# Allegro board daughter_card-v1_00-0a.brd
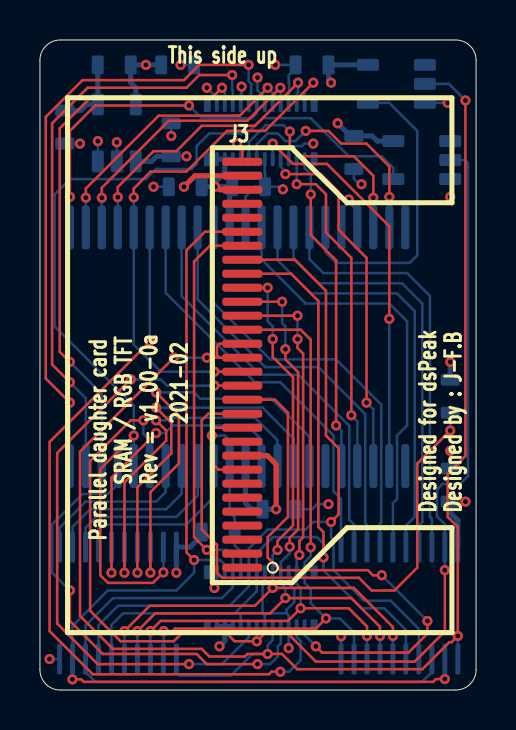
[diagram p0: board, top side]
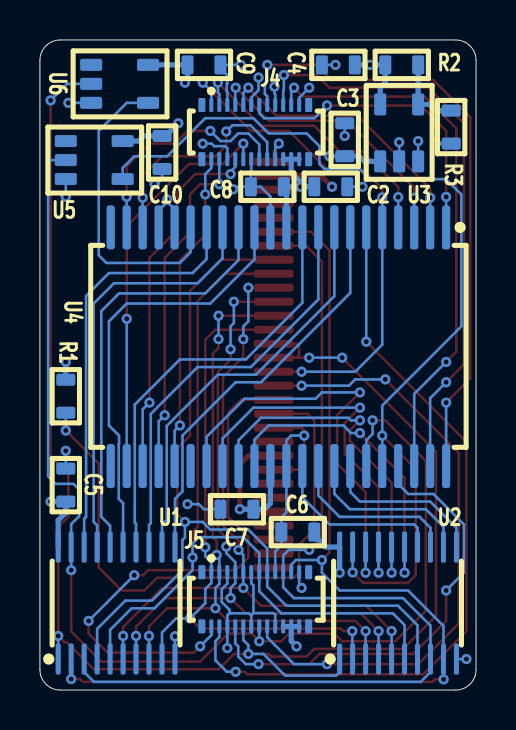
[diagram p1: board, bottom side, seen from below]

Outline 21.84 x 32.51 mm; copper layers: TOP, INNER1, INNER2, BOTTOM. Coordinates in mm from the lower left corner of the outline.
Outline path: 0,31.5 0,1.02 arc(0.3,0.3) 1.02,0 20.83,0 arc(21.55,0.3) 21.84,1.02 21.84,31.5 arc(21.55,32.21) 20.83,32.51 1.02,32.51 arc(0.3,32.21) 0,31.5

## Design rules (mm)
constraint set DEFAULT: min track width 0.127

## Placement (name value [footprint] x y rotation side)
C2  0.1uF  [0603_CAP_IPC]  8.1 25.17 180 bottom
C3  0.1uF  [0603_CAP_IPC]  6.58 26.7 90 bottom
C4  1uF  [0603_CAP_IPC]  6.07 31.27 0 bottom
C5  0.1uF  [0603_CAP_IPC]  20.55 9.42 90 bottom
C6  0.1uF  [0603_CAP_IPC]  8.1 7.9 0 bottom
C7  0.1uF  [0603_CAP_IPC]  11.15 9.04 0 bottom
C8  0.1uF  [0603_CAP_IPC]  9.63 25.17 0 bottom
C9  0.1uF  [0603_CAP_IPC]  14.45 31.27 180 bottom
C10  0.1uF  [0603_CAP_IPC]  15.72 27.71 270 bottom
J3  LCD 0.96" 128x64  [ER-TFT0_96-2]  10.13 6.12 90 top
J4  DF40C-24DP-0.4V  [DF40C-24DP-04V51]  13.26 29.26 0 bottom
J5  DF40C-24DP-0.4V  [DF40C-24DP-04V51]  13.26 5.89 0 bottom
NOREF  -  []  0 31.5 0 top
NOREF#2  -  []  20.83 1.02 90 top
R1  10k  [0603_RES_IPC]  20.55 15.52 270 bottom
R2  1M33  [0603_RES_IPC]  4.55 31.27 180 bottom
R3  1Meg  [0603_RES_IPC]  1.24 28.98 270 bottom
U1  SN74AC245PWR  [TSSOP20-0_65MM]  20.93 1.55 90 bottom
U2  SN74AC245PWR  [TSSOP20-0_65MM]  6.83 1.55 90 bottom
U3  TC107X  [SOT23-5]  4.8 26.44 180 bottom
U4  CY7C1021DV33-10ZSXIT  [TSSOP44-0_8MM]  1.5 23.14 270 bottom
U5  74AHC1G14  [SOT23-5]  20.55 27.46 270 bottom
U6  74AHC1G14  [SOT23-5]  19.28 31.27 270 bottom

## Library data of the parts
C2-C10 = CAP-NP
J3 = ER-TFT0.96-2
J4 J5 = DF40C-24DP-0_8.4V
R1-R3 = Resistor
U1 U2 = SN74AC245PWR
U3 = TC107X
U4 = CY7C1021DV33-10ZSXIT
U5 U6 = 74AHC1G14

## Footprints (pads in the part's own frame, mm; a bottom-side part is the same pattern mirrored in y, then rotated)
0603_CAP_IPC
  rrect 0.599x0.95 smd: 1(0,0) 2(1.651,0)
0603_RES_IPC
  rrect 0.599x0.95 smd: 1(0,0) 2(1.651,0)
DF40C-24DP-04V51
  rrect 0.201x0.701 smd: 1(0,0) 2(0,2.71) 3(-0.399,0) 4(-0.399,2.71) 5(-0.8,0) 6(-0.8,2.71) 7(-1.199,0) 8(-1.199,2.71) 9(-1.6,0) 10(-1.6,2.71) 11(-1.999,0) 12(-1.999,2.71) 13(-2.4,0) 14(-2.4,2.71) 15(-2.799,0) 16(-2.799,2.71) 17(-3.2,0) 18(-3.2,2.71) 19(-3.599,0) 20(-3.599,2.71) 21(-4,0) 22(-4,2.71) 23(-4.399,0) 24(-4.399,2.71)
  rrect 0.35x0.701 smd: 25(0.475,2.71) 26(0.475,0) 27(-4.874,2.71) 28(-4.874,0)
ER-TFT0_96-2
  rrect 0.399x1.999 smd: 1(0,0) 2(0.701,0) 3(1.399,0) 4(2.101,0) 5(2.799,0) 6(3.5,0) 7(4.201,0) 8(4.9,0) 9(5.601,0) 10(6.299,0) 11(7,0) 12(7.699,0) 13(8.4,0) 14(9.101,0) 15(9.799,0) 16(10.5,0) 17(11.199,0) 18(11.9,0) 19(12.601,0) 20(13.299,0) 21(14.001,0) 22(14.699,0) 23(15.4,0) 24(16.101,0) 25(16.8,0) 26(17.501,0) 27(18.199,0) 28(18.9,0) 29(19.601,0) 30(20.3,0)
SOT23-5
  rrect 0.599x1.1 smd: 1(0,0) 2(0.95,0) 3(1.9,0) 4(1.9,2.85) 5(0,2.85)
TSSOP20-0_65MM
  rrect 1.549x0.249 smd: 1(0,0) 2(0,-0.65) 3(0,-1.3) 4(0,-1.951) 5(0,-2.601) 6(0,-3.251) 7(0,-3.899) 8(0,-4.549) 9(0,-5.199) 10(0,-5.85) 11(5.601,-5.85) 12(5.601,-5.199) 13(5.601,-4.549) 14(5.601,-3.899) 15(5.601,-3.251) 16(5.601,-2.601) 17(5.601,-1.951) 18(5.601,-1.3) 19(5.601,-0.65) 20(5.601,0)
TSSOP44-0_8MM
  rrect 2.2x0.409 smd: 1(0,0) 2(0,-0.8) 3(0,-1.6) 4(0,-2.4) 5(0,-3.2) 6(0,-4) 7(0,-4.801) 8(0,-5.601) 9(0,-6.401) 10(0,-7.201) 11(0,-8.001) 12(0,-8.801) 13(0,-9.601) 14(0,-10.399) 15(0,-11.199) 16(0,-11.999) 17(0,-12.799) 18(0,-13.599) 19(0,-14.399) 20(0,-15.199) 21(0,-15.999) 22(0,-16.8) 23(11.938,-16.8) 24(11.938,-15.999) 25(11.938,-15.199) 26(11.938,-14.399) 27(11.938,-13.599) 28(11.938,-12.799) 29(11.938,-11.999) 30(11.938,-11.199) 31(11.938,-10.399) 32(11.938,-9.601) 33(11.938,-8.801) 34(11.938,-8.001) 35(11.938,-7.201) 36(11.938,-6.401) 37(11.938,-5.601) 38(11.938,-4.801) 39(11.938,-4) 40(11.938,-3.2) 41(11.938,-2.4) 42(11.938,-1.6) 43(11.938,-0.8) 44(11.938,0)

## Nets
2V8: C4.1 J3.29 R2.1 U3.5(\VOUT\)
3V3: C2.1 C3.1 C5.1 C6.1 C7.1 C8.1 C9.1 C10.1 J3.9 J3.28 J4.20 J4.22 J4.24 J5.20 J5.22 J5.24 R1.1 U1.20(\VCC\) U2.20(\VCC\) U3.1 U3.3 U4.11 U4.33 U5.5 U6.5
DGND: C2.2 C3.2 C4.2 C5.2 C6.2 C7.2 C8.2 C9.2 C10.2 J3.8 J3.11 J3.30 J4.5 J4.6 J4.11 J4.12 J4.17 J4.18 J4.23 J5.5 J5.6 J5.11 J5.12 J5.17 J5.18 J5.23 R3.2 U1.10 U2.10 U3.2 U4.12 U4.18 U4.19 U4.34 U5.3 U6.3
MEM_D0: U1.11 U4.7
MEM_D1: U1.12 U4.8
MEM_D2: U1.13 U4.9
MEM_D3: U1.14 U4.10
MEM_D4: U1.15 U4.13
MEM_D5: U1.16 U4.14
MEM_D6: U1.17 U4.15
MEM_D7: U1.18 U4.16
MEM_D8: U2.18 U4.29
MEM_D9: U2.17 U4.30
MEM_D10: U2.16 U4.31
MEM_D11: U2.15 U4.32
MEM_D12: U2.14 U4.35
MEM_D13: U2.13 U4.36
MEM_D14: U2.12 U4.37
MEM_D15: U2.11 U4.38
NPMBE: U2.19 U4.40 U5.4(\Y\)
NPMRD/PMWR: J3.16(\WR\) J3.17 J5.10 U1.1 U2.1 U6.2
PMA0: J3.15 J4.1 U4.5
PMA1: J4.3 U4.4
PMA2: J4.7 U4.3
PMA3: J4.9 U4.2
PMA4: J4.13 U4.1
PMA5: J4.15 U4.44
PMA6: J4.19 U4.43
PMA7: J4.21 U4.42
PMA8: J4.2 U4.27
PMA9: J4.4 U4.26
PMA10: J4.8 U4.25
PMA11: J4.10 U4.24
PMA12: J4.14 U4.21
PMA13: J4.16 U4.20
PMBE: J5.14 U1.19 U4.39 U5.2
PMCS1: J3.13 J5.2
PMCS2: J5.4 U4.6
PMD0: J3.18 J5.1 U1.9 U2.2
PMD1: J3.19 J5.3 U1.8 U2.3
PMD2: J3.20 J5.7 U1.7 U2.4
PMD3: J3.21 J5.9 U1.6 U2.5
PMD4: J3.22 J5.13 U1.5 U2.6
PMD5: J3.23 J5.15 U1.4 U2.7
PMD6: J3.24 J5.19 U1.3 U2.8
PMD7: J3.25 J5.21 U1.2 U2.9
PMENB: J5.8 U4.41
PMP_GPIO: J3.14 J5.16
PMRD/NPMWR: U4.17(\W\\E\\\) U6.4(\Y\)
N18222: J3.12 R1.2
N24720: R2.2 R3.1 U3.4

Pads without a net: J3 1 2 3 4 5 6 7 10 26 27; J4 25 26 27 28; J5 25 26 27 28; U4 22 23 28; U5 1; U6 1

## Via types
v1: diameter 0.508, hole 0.254, TOP to BOTTOM, 120 vias

## Routing (per net, layer and track width the routed paths; a pad name or vN(x,y) marks a point on that pad's centre or on a via; arc(x,y) is an arc through that point)
2V8: length 13.6
  TOP w0.254: v1(7.21,25.17) 7.76,25.72 J3.29
  INNER2 w0.254: v1(5.31,31.27) 5.31,27.08 v1(7.21,25.17)
  BOTTOM w0.254: U3.5 4.8,30.12 4.55,30.38 R2.1 v1(5.31,31.27) C4.1
3V3: length 33.7
  TOP w0.254: J3.9 11.39,11.72 11.83,11.28 v1(11.83,9.04) ; v1(8.78,25.17) 8.86,25.17 9.01,25.02 J3.28
  BOTTOM w0.127: C3.1 v1(7.34,26.7) ; U3.3 v1(2.9,27.45)
  BOTTOM w0.254: J4.22 9.26,25.88 8.78,25.4 v1(8.78,25.17) ; J4.22 J4.20 ; J4.22 J4.24 ; U4.33 10.3,9.34 10.6,9.04 C7.1 v1(11.83,9.04) ; J5.22 9.26,2.45 v1(8.99,2.18) ; J5.22 J5.24 ; J5.22 J5.20 ; U3.1 5.6,26.44 5.85,26.7 C3.1 ; U4.11 9.5,25.04 C8.1 v1(8.78,25.17) ; R1.1 v1(20.55,16.41) ; v1(8.78,25.17) C2.1 ; C6.1 8.1,7.72 7.53,7.15 U2.20 v1(6.83,5.87) ; U1.20 20.93,8.49 20.55,8.87 C5.1 v1(21.31,9.42) ; v1(14.91,28.35) 15.55,27.71 C10.1 16.64,27.71 16.89,27.46 U5.5 ; v1(14.58,30.38) 14.45,30.51 C9.1 U6.5
DGND: length 52.9
  TOP w0.127: J3.11 8.74,13.12 8.61,12.99 v1(8.61,12.73) 8.61,11.36 8.94,11.02 J3.8 ; v1(9.88,27.33) 9.88,27.2 10.13,26.95 J3.30
  BOTTOM w0.127: U4.19 15.9,23.98 15.47,24.41 ; J4.18 10.06,27.15 v1(9.88,27.33) ; 12.35,3.84 12.46,3.72 J5.6 v1(12.46,2.1) ; 12.35,3.84 11.37,3.84 11.26,3.72 ; 12.35,3.84 12.35,4.01 12.74,4.4 12.74,5.04 12.46,5.32 J5.5 ; 11.28,25.17 12.04,25.17 v1(12.17,25.04) ; 11.28,25.17 11.28,25.84 11.26,25.85 J4.12 ; 11.28,25.17 10.79,25.17 10.3,24.68 U4.12 ; 15.47,24.41 v1(15.47,24.54) ; 15.47,24.41 15.1,24.04 U4.18 ; U3.2 v1(3.85,27.4) ; U6.3 v1(20.42,29.37) ; 12.8,9.04 13.63,9.04 13.88,9.3 v1(14.45,9.3) ; v1(13.69,27.33) 13.25,27.33 13.12,27.2 12.57,27.2 12.46,27.09 J4.6 ; C5.2 v1(20.55,11.96) ; 11.26,3.72 11.26,3.74 11.15,3.85 ; 11.26,3.72 J5.12 ; U2.10 v1(0.48,1.55) ; J4.11 11.26,29.63 10.9,30 v1(10.9,30.63) ; C3.2 v1(6.58,27.71) ; C2.2 v1(5.69,25.17) ; v1(8.36,30.12) 8.86,29.62 J4.23 ; v1(10.1,30.18) 10.1,29.83 10.06,29.79 J4.17 ; C10.2 15.72,25.57 15.99,25.3 v1(16.1,25.3) ; J5.11 11.26,5.34 11.15,5.23 11.15,3.85 11.15,3.85 ; J4.5 12.46,29.91 12.48,29.94 12.48,30.31 12.46,30.33 12.46,30.75 12.8,31.09 C9.2 v1(11.79,31.27) ; 11.15,3.85 10.15,3.85 10.06,3.76 J5.18 ; v1(8.74,5.11) 8.86,5.23 J5.23 ; J5.17 10.06,6.93 9.75,7.23 9.75,8.63 9.5,8.88 U4.34 9.5,12.49 9.27,12.73 v1(8.61,12.73) ; U5.3 v1(20.55,24.66) ; v1(7.04,31.27) C4.2 ; U1.10 v1(15.08,2.68) ; R3.2 v1(2.01,27.33)
MEM_D0: length 20.4
  BOTTOM w0.127: U4.7 6.3,19.86 10.77,15.39 12.04,15.39 14.7,12.73 14.7,9.94 15.08,9.56 U1.11
MEM_D1: length 20.7
  BOTTOM w0.127: U1.12 15.73,8.27 15.49,8.51 15.49,13.21 12.93,15.77 11.02,15.77 7.1,19.7 U4.8
MEM_D2: length 21.1
  BOTTOM w0.127: U4.9 7.9,19.53 11.28,16.15 13.94,16.15 16.29,13.81 16.29,8.35 16.38,8.26 U1.13
MEM_D3: length 21.4
  BOTTOM w0.127: U4.10 8.7,19.37 11.53,16.54 14.83,16.54 17.09,14.28 17.09,12.3 17.09,12.16 17.09,8.38 17.03,8.32 U1.14
MEM_D4: length 21.8
  BOTTOM w0.127: U1.15 17.68,9.35 17.89,9.56 17.89,12.3 17.88,12.31 17.88,12.73 18.39,13.23 18.39,18.44 17.5,19.33 13.31,19.33 11.1,21.54 U4.13
MEM_D5: length 21.5
  BOTTOM w0.127: U4.14 11.9,21.5 13.56,19.84 17.88,19.84 18.77,18.95 18.77,8.66 18.33,8.22 U1.16
MEM_D6: length 21.2
  BOTTOM w0.127: U4.15 12.7,21.59 13.94,20.35 18.14,20.35 19.15,19.33 19.15,8.41 18.98,8.23 U1.17
MEM_D7: length 21
  BOTTOM w0.127: U4.16 13.5,21.55 14.2,20.85 18.39,20.85 19.53,19.71 19.53,8.66 19.63,8.56 U1.18
MEM_D8: length 21.4
  TOP w0.127: v1(5.82,14.88) 6.96,13.74 6.96,11.33 5.53,9.9 v1(5.53,5.87)
  BOTTOM w0.127: U4.29 13.5,12.66 11.59,14.57 8.04,14.57 7.72,14.88 v1(5.82,14.88) ; U2.18 v1(5.53,5.87)
MEM_D9: length 19.5
  TOP w0.127: v1(5.82,14.12) 6.58,13.36 6.58,11.84 4.88,10.14 v1(4.88,5.87)
  BOTTOM w0.127: U2.17 v1(4.88,5.87) ; v1(5.82,14.12) 11.15,14.12 12.7,12.58 U4.30
MEM_D10: length 17.9
  TOP w0.127: v1(4.23,5.87) 4.23,10.38 6.32,12.47 6.32,12.98 v1(5.82,13.49)
  BOTTOM w0.127: v1(5.82,13.49) 6.26,13.49 6.39,13.61 10.77,13.61 11.9,12.49 U4.31 ; U2.16 v1(4.23,5.87)
MEM_D11: length 16.2
  TOP w0.127: v1(5.82,12.85) 3.58,10.62 v1(3.58,5.87)
  BOTTOM w0.127: U2.15 v1(3.58,5.87) ; U4.32 11.1,12.52 10.39,13.23 6.64,13.23 6.26,12.85 v1(5.82,12.85)
MEM_D12: length 8.9
  BOTTOM w0.127: U4.35 8.7,9.64 7.34,8.28 3.1,8.28 2.93,8.12 U2.14
MEM_D13: length 8.7
  BOTTOM w0.127: U2.13 2.28,8.12 2.83,8.66 6.83,8.66 7.9,9.73 U4.36
MEM_D14: length 8.5
  BOTTOM w0.127: U4.37 7.1,9.82 6.32,9.04 2.51,9.04 1.63,8.16 U2.12
MEM_D15: length 8.3
  BOTTOM w0.127: U2.11 0.98,8.12 2.29,9.42 5.82,9.42 6.3,9.91 U4.38
NPMBE: length 48.4
  TOP w0.127: v1(6.18,5.88) 5.66,5.36 3.4,5.36 3.02,5.74 3.02,11.05 v1(4.7,12.73)
  BOTTOM w0.127: U5.4 17.7,26.12 17.12,26.7 15.47,26.7 13.56,28.6 11.15,28.6 10.39,27.84 8.48,27.84 7.85,27.2 7.85,26.31 7.59,26.06 5.82,26.06 5.31,25.55 1.5,25.55 0.74,24.79 0.74,18.19 4.7,14.22 v1(4.7,12.73) U4.40 ; U2.19 v1(6.18,5.88)
NPMRD/PMWR: length 79.2
  TOP w0.127: J3.17 8.99,17.32 8.86,17.19 8.86,16.74 8.99,16.62 ; v1(21.31,29.49) 21.31,11.71 20.42,10.82 20.42,8.66 20.93,8.15 v1(20.93,2.71) 20.62,2.39 20.5,2.39 19.15,1.04 12.88,1.04 12.12,1.8 v1(11.4,1.8) 10.39,1.8 10.26,1.68 8.48,1.68 8.1,2.06 3.66,2.06 2.01,3.71 2.01,11.92 v1(6.71,16.62) ; 8.99,16.62 J3.16 ; 8.99,16.62 v1(8.36,16.62)
  BOTTOM w0.127: U6.2 20.48,30.32 v1(21.31,29.49) ; U2.1 6.83,0.9 7.01,0.72 9.56,0.72 10.64,1.8 v1(11.4,1.8) 11.4,2.25 11.66,2.5 J5.10 ; U1.1 v1(20.93,2.71) ; v1(6.71,16.62) v1(8.36,16.62)
PMA0: length 26.3
  TOP w0.127: J3.15 v1(8.74,15.92) ; v1(13.69,30.38) 11.28,27.97 9.37,27.97 7.34,25.93 5.55,25.93 4.7,25.08 v1(4.7,24.64)
  BOTTOM w0.127: J4.1 13.26,29.95 v1(13.69,30.38) ; v1(4.7,24.64) U4.5 4.7,17.27 6.05,15.92 v1(8.74,15.92)
PMA1: length 14.4
  TOP w0.127: v1(3.9,24.65) 3.9,25.16 5.69,26.95 6.83,26.95 8.1,28.22 10.77,28.22 v1(12.93,30.38)
  BOTTOM w0.127: v1(12.93,30.38) 12.93,29.88 12.86,29.81 J4.3 ; U4.4 v1(3.9,24.65)
PMA2: length 13.9
  TOP w0.127: v1(12.04,30.12) 10.39,28.47 6.45,28.47 3.1,25.12 v1(3.1,24.62)
  BOTTOM w0.127: v1(12.04,30.12) 12.06,30.1 J4.7 ; U4.3 v1(3.1,24.62)
PMA3: length 14.1
  TOP w0.127: v1(11.4,30.12) 10.01,28.73 5.94,28.73 2.3,25.08 v1(2.3,24.63)
  BOTTOM w0.127: v1(11.4,30.12) 11.66,29.87 J4.9 ; U4.2 v1(2.3,24.63)
PMA4: length 15.5
  TOP w0.127: v1(7.47,29.24) 2.77,29.24 1.5,27.97 v1(1.5,24.66)
  BOTTOM w0.127: v1(7.47,29.24) 8.1,28.6 10.61,28.6 10.86,28.85 J4.13 ; v1(1.5,24.66) U4.1
PMA5: length 31.3
  TOP w0.127: v1(1.5,14.38) 0.29,15.58 0.29,28.66 2.13,30.51 7.21,30.51 7.98,31.27 v1(10.45,31.27)
  BOTTOM w0.127: U4.44 v1(1.5,14.38) ; J4.15 10.46,29.69 10.58,29.81 10.58,30.32 10.45,30.45 v1(10.45,31.27)
PMA6: length 29.4
  TOP w0.127: v1(9.63,30.76) 7.98,30.76 7.34,30.12 2.39,30.12 0.61,28.35 0.61,16.28 v1(1.5,15.39)
  BOTTOM w0.127: v1(1.5,15.39) 2.3,14.59 U4.43 ; J4.19 9.66,29.99 9.63,30.02 v1(9.63,30.76)
PMA7: length 27.7
  TOP w0.127: v1(9.12,30.12) 8.67,29.68 2.58,29.68 0.99,28.09 0.99,16.92 v1(1.5,16.41)
  BOTTOM w0.127: v1(1.5,16.41) 3.1,14.81 U4.42 ; v1(9.12,30.12) 9.26,29.98 J4.21
PMA8: length 16.1
  TOP w0.127: v1(14.83,13.23) 14.83,21.49 13.56,22.76 v1(13.56,24.79)
  BOTTOM w0.127: U4.27 15.1,12.97 v1(14.83,13.23) ; v1(13.56,24.79) 13.56,25.8 13.26,26.11 J4.2
PMA9: length 17.2
  TOP w0.127: v1(15.6,13.74) 15.6,21.62 14.33,22.89 14.33,24.79 13.82,25.3 v1(12.86,25.3)
  BOTTOM w0.127: v1(15.6,13.74) 15.9,13.44 U4.26 ; J4.4 v1(12.86,25.3)
PMA10: length 18.3
  TOP w0.127: v1(16.36,14.38) 16.36,21.62 14.96,23.01 14.96,24.92 14.07,25.81 v1(12.29,25.81)
  BOTTOM w0.127: U4.25 16.7,14.04 v1(16.36,14.38) ; v1(12.29,25.81) 12.29,25.93 12.06,26.17 J4.8
PMA11: length 20.3
  TOP w0.127: v1(11.66,27.33) 12.67,26.31 14.38,26.31 17.5,23.19 v1(17.5,18.57)
  BOTTOM w0.127: v1(17.5,18.57) U4.24 ; v1(11.66,27.33) J4.10
PMA12: length 11.8
  TOP w0.127: v1(13.31,27.97) 14.45,27.97 15.09,27.33 16.36,27.33 17.5,26.19 v1(17.5,24.66)
  BOTTOM w0.127: U4.21 17.5,23.14 v1(17.5,24.66) ; J4.14 10.86,27.29 11.4,27.84 11.91,27.84 12.29,27.46 12.8,27.46 v1(13.31,27.97)
PMA13: length 11.5
  TOP w0.127: v1(16.7,24.62) 16.7,25.72 15.72,26.7 13.06,26.7 12.52,27.24 v1(12.52,27.93)
  BOTTOM w0.127: v1(12.52,27.93) 12.2,28.25 11.31,28.25 10.46,27.4 J4.16 ; U4.20 v1(16.7,24.62)
PMBE: length 59.9
  TOP w0.127: v1(5.18,13.49) 4.55,13.49 2.51,11.46 2.51,3.96 4.04,2.44 6.71,2.44 7.09,2.82 9.37,2.82 9.75,2.44 v1(10.86,2.44) 11.24,2.82 12.42,2.82 13.82,1.42 18.77,1.42 20.28,2.93 v1(20.28,5.99)
  BOTTOM w0.127: J5.14 v1(10.86,2.44) ; v1(5.18,13.49) 5.18,12.81 5.5,12.49 U4.39 ; U5.2 21.29,26.51 21.44,26.36 21.44,10.69 21.06,10.31 20.17,10.31 19.88,10.03 19.88,8.69 20.28,8.3 U1.19 v1(20.28,5.99)
PMCS1: length 27.5
  TOP w0.127: J3.13 11.77,14.52 12.42,13.87 12.42,8.66 11.4,7.65 11.4,6.63 12.04,5.99 16.42,5.99 16.68,5.74 v1(17.12,5.74) ; v1(19.41,3.45) 19.41,2.82 18.46,1.87 14.13,1.87 v1(13.82,2.18)
  BOTTOM w0.127: J5.2 13.26,2.74 v1(13.82,2.18) ; v1(17.12,5.74) v1(19.41,3.45)
PMCS2: length 37.8
  TOP w0.127: v1(5.5,17.42) 0.48,12.41 0.48,2.95 2.64,0.79 11.47,0.79 11.6,0.91 v1(12.04,0.91)
  BOTTOM w0.127: U4.6 v1(5.5,17.42) ; J5.4 12.86,2.64 13.06,2.45 13.06,1.49 12.48,0.91 v1(12.04,0.91)
PMD0: length 31
  TOP w0.127: v1(14.33,3.58) 13.82,3.07 6.77,3.07 6.64,2.95 v1(6.2,2.95) ; J3.18 13.06,18.02 13.56,17.52 v1(13.56,7.14)
  BOTTOM w0.127: U2.2 6.2,1.56 v1(6.2,2.95) ; U1.9 15.73,2.88 15.02,3.58 v1(14.33,3.58) 13.56,4.34 13.56,5.05 13.26,5.35 J5.1 13.26,6.39 13.44,6.57 13.44,6.57 13.56,6.69 v1(13.56,7.14)
PMD1: length 32.5
  TOP w0.127: J3.19 v1(12.9,18.72) ; v1(12.99,6.76) 12.99,7.46 13.18,7.65 13.18,16.82 12.9,17.11 v1(12.9,17.55) ; v1(5.53,2.95) 6.04,3.45 12.42,3.45 v1(13.06,4.09) 15.47,4.09 16.38,3.18 v1(16.38,2.71)
  BOTTOM w0.127: U1.8 v1(16.38,2.71) ; v1(13.06,4.09) 13.06,5.11 12.86,5.3 J5.3 12.86,6.63 12.99,6.76 v1(12.99,6.76) ; U2.3 v1(5.53,2.95) ; v1(12.9,18.72) v1(12.9,17.55)
PMD2: length 34
  TOP w0.127: J3.20 v1(12.13,19.42) ; v1(12.51,7.17) 12.51,7.61 12.93,8.03 12.93,15.9 12.29,16.54 v1(12.29,17.04) ; v1(4.88,2.95) 5.77,3.84 11.53,3.84 v1(12.29,4.6) 15.6,4.6 17.03,3.16 v1(17.03,2.71)
  BOTTOM w0.127: v1(12.51,7.17) 12.51,6.85 12.06,6.4 J5.7 12.06,5.34 12.29,5.11 v1(12.29,4.6) ; U2.4 v1(4.88,2.95) ; v1(12.29,17.04) 12.29,18.19 12.13,18.35 v1(12.13,19.42) ; U1.7 v1(17.03,2.71)
PMD3: length 35.4
  TOP w0.127: v1(11.9,7.01) 11.9,7.45 12.67,8.23 12.67,15.65 11.66,16.66 v1(11.66,17.55) ; v1(17.68,2.71) 17.68,3.15 15.72,5.11 v1(11.66,5.11) 10.77,4.22 5.5,4.22 v1(4.23,2.95) ; J3.21 v1(11.4,20.12)
  BOTTOM w0.127: v1(11.66,5.11) J5.9 11.66,6.76 11.9,6.99 v1(11.9,7.01) ; v1(11.66,17.55) 11.66,18.19 11.4,18.44 v1(11.4,20.12) ; v1(17.68,2.71) U1.6 ; v1(4.23,2.95) U2.5
PMD4: length 40.9
  TOP w0.127: J3.22 12.58,20.82 13.94,19.46 13.94,8.15 14.2,7.9 v1(14.2,6.63)
  BOTTOM w0.127: U1.5 18.33,3.01 17.25,4.09 16.1,4.09 14.2,6 14.2,6.18 14.2,6.18 v1(14.2,6.63) 14.2,7.32 13.88,7.65 11.66,7.65 10.86,6.85 J5.13 10.86,4.94 9.75,3.84 4.17,3.84 3.58,3.25 U2.6
PMD5: length 42.9
  TOP w0.127: v1(14.58,8.41) 14.96,8.79 14.96,12.09 14.33,12.73 14.33,19.96 12.77,21.52 J3.23
  BOTTOM w0.127: U1.4 18.98,3.06 17.56,4.47 16.23,4.47 14.71,5.99 14.71,7.5 14.58,7.63 v1(14.58,8.41) 13.69,8.41 13.31,8.03 11.4,8.03 10.46,7.08 J5.15 10.46,5.18 9.5,4.22 3.91,4.22 2.93,3.24 U2.7
PMD6: length 49.3
  TOP w0.127: J3.24 8.51,22.22 7.72,21.43 7.72,7.65 v1(8.36,7.01)
  BOTTOM w0.127: v1(8.36,7.01) 9.37,7.01 9.66,6.72 J5.19 9.66,5.14 9.12,4.6 3.66,4.6 2.28,3.22 U2.8 2.28,0.9 2.78,0.41 19.14,0.41 19.63,0.9 U1.3
PMD7: length 51.1
  TOP w0.127: v1(1.63,0.53) 2.07,0.53 2.2,0.41 19.69,0.41 19.83,0.55 v1(20.28,0.55) ; v1(7.72,6.5) 7.34,6.88 7.34,22 8.27,22.92 J3.25
  BOTTOM w0.127: v1(1.63,0.53) 1.63,1.54 U2.9 1.63,3.21 3.4,4.98 6.83,4.98 7.72,5.87 v1(7.72,6.5) 9.02,6.5 9.26,6.27 J5.21 ; U1.2 v1(20.28,0.55)
PMENB: length 23.3
  TOP w0.127: v1(1.5,4.98) 1.5,3.45 3.15,1.8 7.85,1.8 8.36,1.3 v1(10.9,1.3)
  BOTTOM w0.127: J5.8 12.06,2.33 11.91,2.18 11.91,1.68 11.53,1.3 v1(10.9,1.3) ; v1(1.5,4.98) 0.61,5.87 0.61,8.28 2.13,9.8 3.4,9.8 3.9,10.31 U4.41
PMP_GPIO: length 31
  TOP w0.127: J3.14 v1(8.74,15.22) ; v1(7.47,1.3) 2.9,1.3 0.86,3.33 0.86,11.85 v1(4.55,15.54)
  BOTTOM w0.127: v1(8.74,15.22) 6.37,15.22 6.05,15.54 v1(4.55,15.54) ; v1(7.47,1.3) 9.12,1.3 10.46,2.64 J5.16
PMRD/NPMWR: length 15.5
  BOTTOM w0.127: U6.4 17.5,29.37 18.9,27.97 18.9,21.74 18.52,21.36 14.83,21.36 14.3,21.9 U4.17
N18222: length 29.4
  TOP w0.127: v1(20.55,12.98) 18.9,11.33 18.9,6.12 17.75,4.98 16.61,4.98 15.98,5.61 9.12,5.61 8.86,5.87 8.86,7.26 8.1,8.03 8.1,13.49 8.44,13.82 J3.12
  BOTTOM w0.127: 20.55,13.87 v1(20.55,12.98)
N24720: length 3.8
  BOTTOM w0.254: R3.1 2.04,28.98 2.35,29.29 U3.4 2.9,30.1 2.9,30.1 R2.2

## Copper pours and planes (outline as drawn; the poured copper is in the pictures)
3V3 on INNER2: 20.55,32.28 20.61,32.29 21.29,32.01 21.57,31.33 21.56,31.27 21.56,1.3 21.57,1.23 21.29,0.56 20.61,0.28 20.55,0.28 1.24,0.28 1.18,0.28 0.51,0.56 0.23,1.23 0.23,1.3 0.23,31.27 0.23,31.33 0.51,32.01 1.18,32.29 1.24,32.28
DGND on INNER1: 20.55,32.28 20.61,32.29 21.29,32.01 21.57,31.33 21.56,31.27 21.56,1.3 21.57,1.23 21.29,0.56 20.61,0.28 20.55,0.28 1.24,0.28 1.18,0.28 0.51,0.56 0.23,1.23 0.23,1.3 0.23,31.27 0.23,31.33 0.51,32.01 1.18,32.29 1.24,32.28

## Text on the board
Ref Des/Silkscreen Top: This side up | Parallel daughter card | SRAM / RGB TFT | Rev = v1_00-0a | 2021-02 | Designed for dsPeak | Designed by : J-F.B
XSECTION_CHART: *  SURFACE - 0 MM | L1 TOP CONDUCTOR - 0.0254 MM | *  DIELECTRIC - 0.2032 MM | L2 INNER1 PLANE - 0.0254 MM | *  DIELECTRIC - 1.09 MM | L3 INNER2 PLANE - 0.0254 MM | L4 BOTTOM CONDUCTOR - 0.0254 MM | DESIGN CROSS SECTION CHART | ___________________________ | TOTAL THICKNESS 1.598 MM | 1-4 | FIGURE | FINISHED_SIZE | 0.254 | DRILL CHART: TOP to BOTTOM | ALL UNITS ARE IN MILLIMETERS | PLATED | QTY | 120
